# Altium PCB UControl_Module_PCB.PcbDoc
Units mm, origin at the board's own origin, x right, y up, seen from the top; angles counter-clockwise.
Board outline 135 x 63 mm, 2 copper layers (Top Layer, Bottom Layer); 89 components, 121 nets, 602 pads, 57 vias.
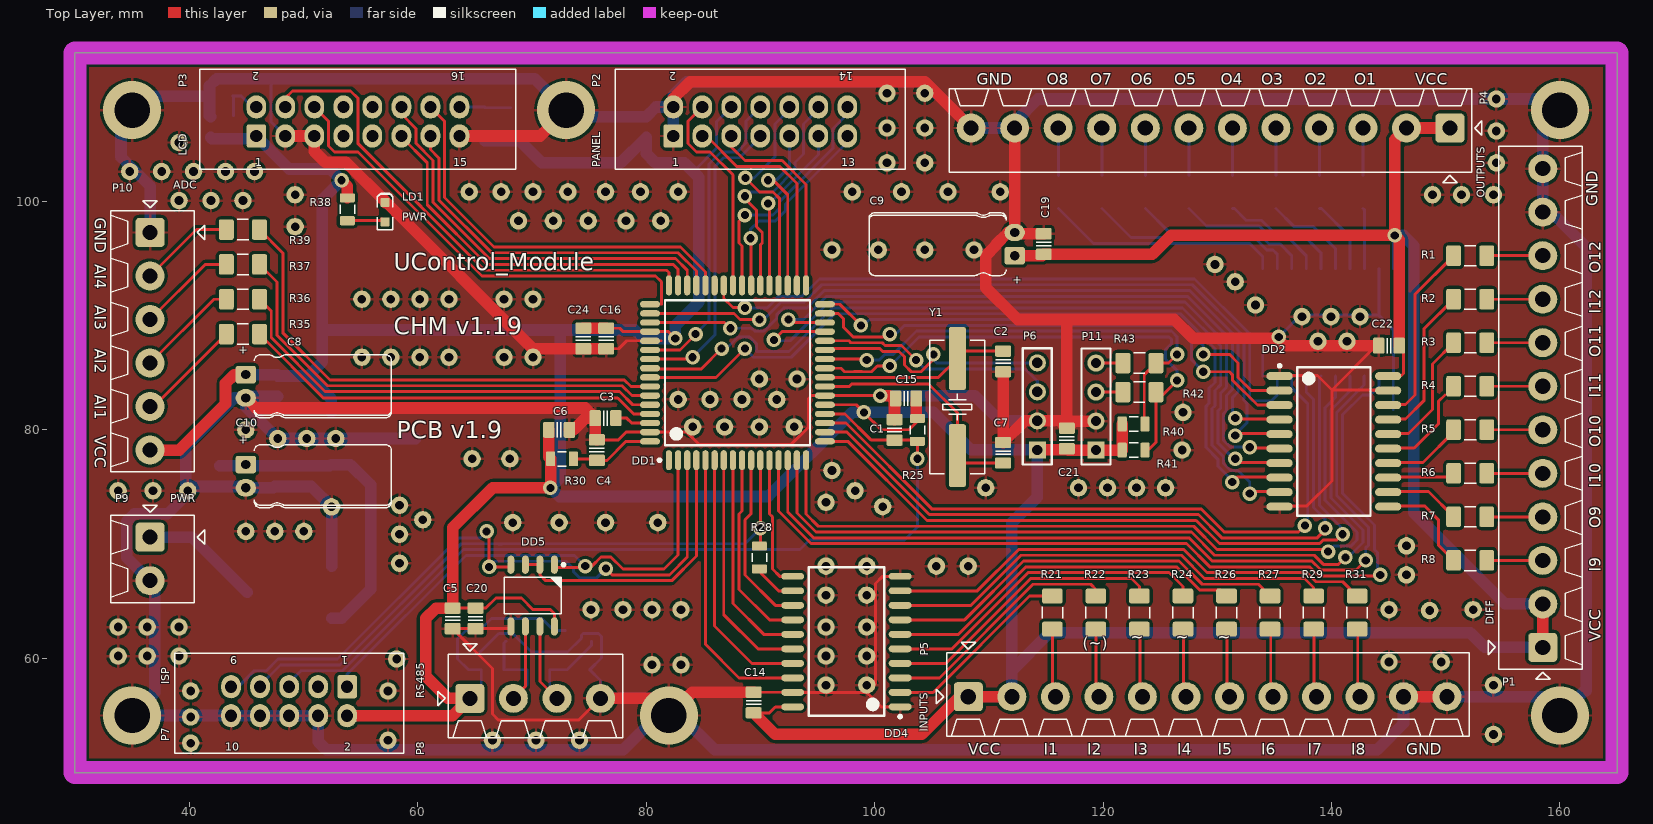
[diagram p0: Top Layer view]
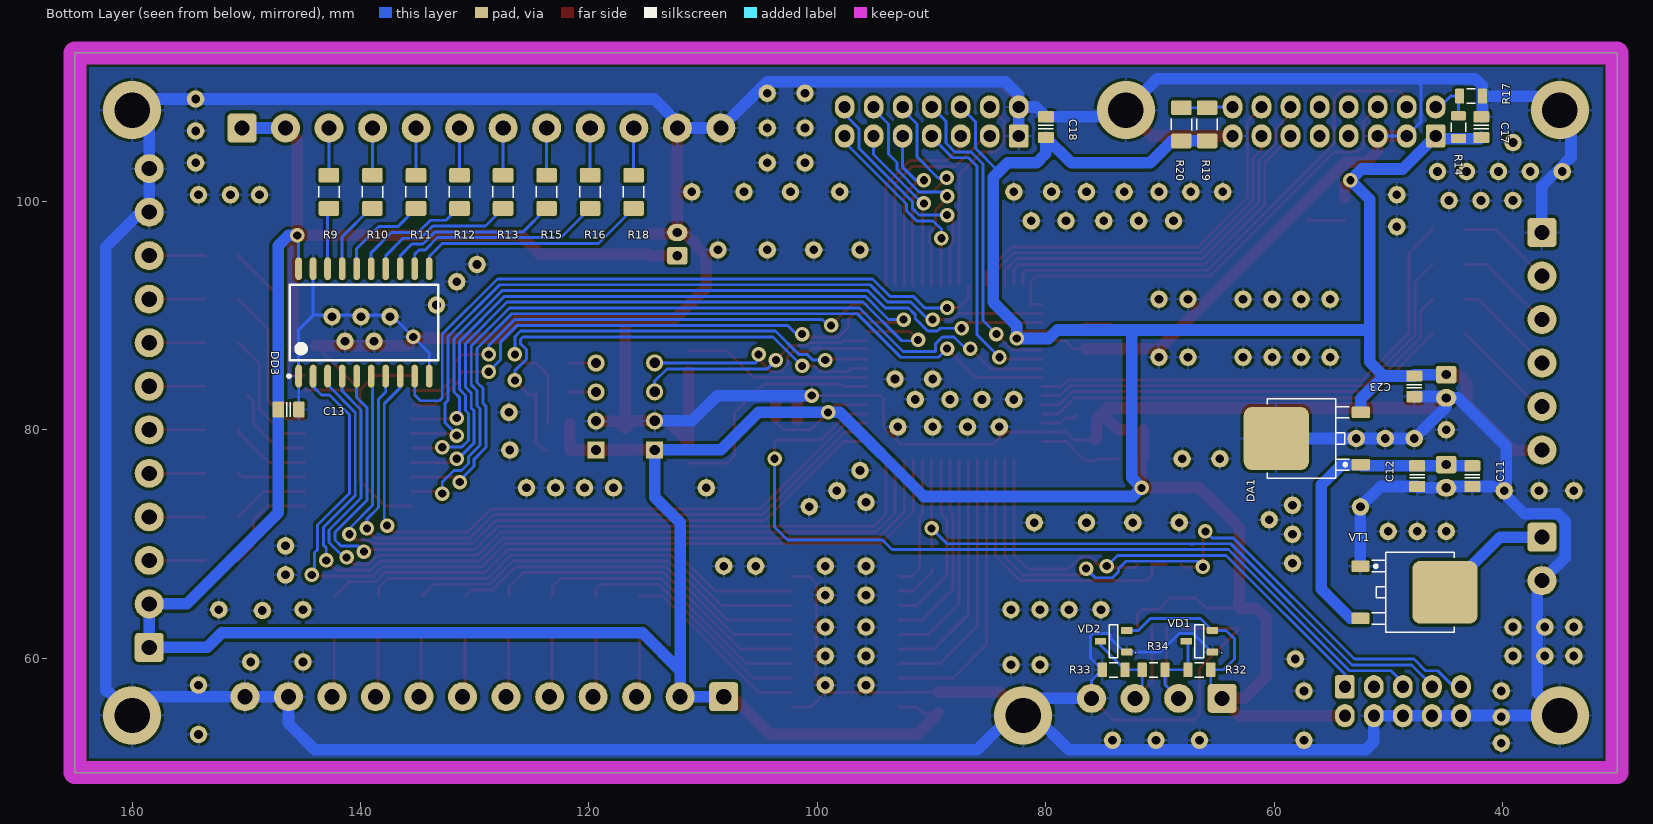
[diagram p1: Bottom Layer view, seen from below]

## Layer stack, top to bottom
Top Solder: solder mask 0.0102, Solder Resist, Dk 3.5
Top Layer: signal copper 0.0356
Dielectric1: dielectric 0.32, FR-4, Dk 4.8
Bottom Layer: signal copper 0.0356
Bottom Solder: solder mask 0.0102, Solder Resist, Dk 3.5

## Board outline
30,50 30,113 165,113 165,50

## Design rules (kind name [scope] priority, off if disabled: settings)
Clearance [All] p1: gap=0.254
PolygonConnect [All] p1: connectstyle=Relief reliefconductorwidth=0.254 reliefentries=4 polygonreliefangle="90 Angle" airgapwidth=0.254
RoutingVias [All] p1: holewidth=0.711 width=1.27 viastyle="Through Hole" minholewidth=0.711 minwidth=1.27 maxholewidth=0.711 maxwidth=1.27
SilkToSolderMaskClearance SilkscreenOverComponentPads [IsPad] p1: minsilkscreentomaskgap=0.254 clearancetoexposedcopper=TRUE
SolderMaskExpansion [All] p1: expansion=0.102
Width "Schematic Width Constraint_2" [InNet('NetP9_1')] p1: maxlimit=1.016 minlimit=0.254 preferedwidth=1.016
Width "Schematic Width Constraint_1" [InNet('GND')] p2: maxlimit=1.016 minlimit=0.254 preferedwidth=1.016
Width "Schematic Width Constraint" [InNet('VCC+12V')] p3: maxlimit=1.016 minlimit=0.254 preferedwidth=1.016
Width "Schematic Width Constraint_3" [InNet('VCC')] p4: maxlimit=1.016 minlimit=0.254 preferedwidth=1.016
Width [All] p5: maxlimit=0.254 minlimit=0.254 preferedwidth=0.254
29 further rules are at their usual default settings.

## Components (designator, comment, footprint, x,y, rotation, side; value= is the part's Value field where it differs from the comment)
C1 "C0805" CAPC2012X135N 101.75,80 r270 top
C2 "C0805" CAPC2012X135N 111.25,86 r90 top
C3 "C0805" CAPC2012X135N 76.454,81.026 r0 top
C4 "C0805" CAPC2012X135N 75.692,78.232 r270 top
C5 "C0805" CAPC2012X135N 63.07,63.5 r90 top
C6 "C0805" CAPC2012X135N 72.39,80.01 r180 top
C7 "C0805" CAPC2012X135N 111.25,78 r270 top
C8 "Cap Pol1" CAPAE200P550X1200_FLAT1 44.958,83.82 r270 top
C9 "Cap Pol1" CAPAE200P550X1200_FLAT1 112.268,96.266 r90 top
C10 "Cap Pol1" CAPAE200P550X1200_FLAT1 44.958,75.946 r270 top
C11 "C0805" CAPC2012X135N 42.672,75.946 r90 bottom
C12 "C0805" CAPC2012X135N 47.498,75.946 r90 bottom
C13 "C0805" CAPC2012X135N 146.304,81.788 r0 bottom
C14 "C0805" CAPC2012X135N 89.408,56.134 r270 top
C15 "C0805" CAPC2012X135N 102.75,82.75 r0 top
C16 "C0805" CAPC2012X135N 76.5,88 r90 top
C17 "C0805" CAPC2012X135N 41.888,106.5 r270 bottom
C18 "C0805" CAPC2012X135N 80,106.5 r270 bottom
C19 "C0805" CAPC2012X135N 114.808,96.266 r270 top
C20 "C0805" CAPC2012X135N 65.07,63.5 r90 top
C21 "C0805" CAPC2012X135N 116.84,79.248 r270 top
C22 "C0805" CAPC2012X135N 145.034,87.376 r0 top
C23 "C0805" CAPC2012X135N 47.752,83.82 r90 bottom
C24 "C0805" CAPC2012X135N 74.5,88 r90 top
DA1 "MC7805CD2TR4G" TO-252 56.134,79.248 r90 bottom
DD1 "ATmega128A-AU" 64A_N 88,85 r90 top
DD2 "MC74VHCT244ADT" 751D-04_M 140.208,78.994 r0 top
DD3 "MC74HC541ADW" 751D-05_N 139.7,89.408 r90 bottom
DD4 "MC74HC541ADW" 751D-05_N 97.536,61.468 r180 top
DD5 "MAX485" SOIC127P600X175-8AN 70.07,65.5 r270 top
LD1 "PWR" LED-0603-BLUE 57.15,99.06 r90 top
P1 "DIFF" 12P_PCB_ScrewTerm_90S_3.81MM 158.496,60.96 r0 top
P2 "PANEL" 14P_PCB_HEADER_BRD_MNT 90,107 r90 top
P3 "LCD" 16P_PCB_HEADER_BRD_MNT 54.768,107 r90 top
P4 "OUTPUTS" 12P_PCB_ScrewTerm_90S_3.81MM 150.368,106.426 r90 top
P5 "INPUTS" 12P_PCB_ScrewTerm_90S_3.81MM 108.204,56.642 r270 top
P6 "DEBUG" HDR1X4 114.25,78.25 r90 top
P7 "ISP" 10P_PCB_HEADER_BRD_MNT 48.75,56.25 r270 top
P8 "RS485" 4P_PCB_ScrewTerm_90S_3.81MM 64.57,56.5 r270 top
P9 "PWR" 2P_PCB_ScrewTerm_90S_3.81MM 36.576,70.612 r180 top
P10 "ADC" 6P_PCB_ScrewTerm_90S_3.81MM 36.576,97.282 r180 top
P11 "INT/I2C" HDR1X4 119.38,78.232 r90 top
R1 "Res2" RESC3216X70N 152.146,95.25 r0 top
R2 "Res2" RESC3216X70N 152.146,91.44 r0 top
R3 "Res2" RESC3216X70N 152.146,87.63 r0 top
R4 "Res2" RESC3216X70N 152.146,83.82 r0 top
R5 "Res2" RESC3216X70N 152.146,80.01 r0 top
R6 "Res2" RESC3216X70N 152.146,76.2 r0 top
R7 "Res2" RESC3216X70N 152.146,72.39 r0 top
R8 "Res2" RESC3216X70N 152.146,68.58 r0 top
R9 "Res2" RESC3216X70N 142.764,100.838 r90 bottom
R10 "Res2" RESC3216X70N 138.954,100.838 r90 bottom
R11 "Res2" RESC3216X70N 135.144,100.838 r90 bottom
R12 "Res2" RESC3216X70N 131.334,100.838 r90 bottom
R13 "Res2" RESC3216X70N 127.524,100.838 r90 bottom
R14 "Res2" RESC2012X70N 43.888,106.5 r90 bottom
R15 "Res2" RESC3216X70N 123.714,100.838 r90 bottom
R16 "Res2" RESC3216X70N 119.904,100.838 r90 bottom
R17 "Res2" RESC2012X70N 42.784,109.22 r0 bottom
R18 "Res2" RESC3216X70N 116.094,100.838 r90 bottom
R19 "Res2" RESC3216X70N 65.888,106.75 r90 bottom
R20 "Res2" RESC3216X70N 68.138,106.75 r90 bottom
R21 "Res2" RESC3216X70N 115.57,64.008 r270 top
R22 "Res2" RESC3216X70N 119.38,64.008 r270 top
R23 "Res2" RESC3216X70N 123.19,64.008 r270 top
R24 "Res2" RESC3216X70N 127,64.008 r270 top
R25 "Res2" RESC2012X70N 103.75,80 r270 top
R26 "Res2" RESC3216X70N 130.81,64.008 r270 top
R27 "Res2" RESC3216X70N 134.62,64.008 r270 top
R28 "Res2" RESC2012X70N 89.916,68.834 r270 top
R29 "Res2" RESC3216X70N 138.43,64.008 r270 top
R30 "Res2" RESC2012X70N 72.644,77.47 r180 top
R31 "Res2" RESC3216X70N 142.24,64.008 r270 top
R32 "Res2" RESC2012X70N 66.57,59 r180 bottom
R33 "Res2" RESC2012X70N 74.07,59 r180 bottom
R34 "Res2" RESC2012X70N 70.57,59 r0 bottom
R35 "Res2" RESC3216X70N 44.704,88.392 r0 top
R36 "Res2" RESC3216X70N 44.704,91.44 r0 top
R37 "Res2" RESC3216X70N 44.704,94.488 r0 top
R38 "Res2" RESC2012X70N 53.848,99.314 r90 top
R39 "Res2" RESC3216X70N 44.704,97.536 r0 top
R40 "Res2" RESC2012X70N 122.682,80.518 r180 top
R41 "Res2" RESC2012X70N 122.682,78.232 r180 top
R42 "Res2" RESC3216X70N 123.19,83.312 r180 top
R43 "Res2" RESC3216X70N 123.19,85.852 r180 top
VD1 "BAV99" SOT23-3 66.57,61.5 r0 bottom
VD2 "BAV99" SOT23-3 74.07,61.5 r0 bottom
VT1 "IRFU5505" TO-252 48.768,65.786 r270 bottom
Y1 "HC49/4H_SMX" CRYSTAL_HC49-US-SM 107.25,82 r90 top

## Footprints (in the part's own frame and the unit in brackets; to place one, negate y for a bottom-side part, rotate by r counter-clockwise, add the part's x,y. Pads: shape width x height; smd on the part's side, far side on the other; paste and mask are expansions set on the pad)
2P_PCB_ScrewTerm_90S_3.81MM [mil] "TERM BLOCK 2POS SIDE ENT STACKABLE 3.81MM"
  rrect25% 100x100 hole 52: 1(0,0)
  round 100 hole 52: 2(0,150)
  silkscreen extent -188,-110 136,226, body extent -152,-75 136,225, height 335
4P_PCB_ScrewTerm_90S_3.81MM [mil]
  rrect25% 100x100 hole 52: 1(0,0)
  round 100 hole 52: 2(0,150) 3(0,300) 4(0,450)
  silkscreen extent -188,-110 136,526, body extent -152,-75 136,525, height 335
6P_PCB_ScrewTerm_90S_3.81MM [mil] "TERM BLOCK 6POS SIDE ENT STACKABLE 3.81MM"
  rrect25% 100x100 hole 52: 1(0,0)
  round 100 hole 52: 2(0,150) 3(0,300) 4(0,450) 5(0,600) 6(0,750)
  silkscreen extent -188,-110 136,825, body extent -152,-75 136,825, height 335
10P_PCB_HEADER_BRD_MNT [mil] "HEADER BRD MNT 10POS 2.54MM"
  round 40 on Mech15: 0(0,0)
  rrect25% 80x68 hole 42: 1(-50,200)
  oval 80x68 hole 42: 2(50,200) 3(-50,100) 4(50,100) 5(-50,0) 6(50,0) 7(-50,-100) 8(50,-100) 9(-50,-200) 10(50,-200)
  silkscreen extent -165,-395 180,395, body extent -162,-394 178,394, height 390
12P_PCB_ScrewTerm_90S_3.81MM [mil]
  rrect25% 100x100 hole 52: 1(0,0)
  round 100 hole 52: 2(0,150) 3(0,300) 4(0,450) 5(0,600) 6(0,750) 7(0,900) 8(0,1050) 9(0,1200) 10(0,1350) 11(0,1500) 12(0,1650)
  silkscreen extent -188,-110 136,1726, body extent -152,-75 139,1725, height 335
14P_PCB_HEADER_BRD_MNT [mil] "HEADER BRD MNT 14POS 2.54MM"
  round 40 on Mech15: 0(0,0)
  rrect25% 80x68 hole 42: 1(-50,300)
  oval 80x68 hole 42: 2(50,300) 3(-50,200) 4(50,200) 5(-50,100) 6(50,100) 7(-50,0) 8(50,0) 9(-50,-100) 10(50,-100) 11(-50,-200) 12(50,-200) 13(-50,-300) 14(50,-300)
  silkscreen extent -165,-500 180,500, body extent -162,-494 178,494, height 390
16P_PCB_HEADER_BRD_MNT [mil] "HEADER BRD MNT 16POS 2.54MM"
  round 40 on Mech15: 0(0,0)
  rrect25% 80x68 hole 42: 1(-50,350)
  oval 80x68 hole 42: 2(50,350) 3(-50,250) 4(50,250) 5(-50,150) 6(50,150) 7(-50,50) 8(50,50) 9(-50,-50) 10(50,-50) 11(-50,-150) 12(50,-150) 13(-50,-250) 14(50,-250) 15(-50,-350) 16(50,-350)
  silkscreen extent -165,-545 180,545, body extent -162,-544 178,544, height 390
64A_N [mm] "Thin QFP, 64-Leads, Body 14x14mm, Pitch 0.8mm, IPC Medium Density"
  oval 1.75x0.55 smd: 1(-7.65,6) 2(-7.65,5.2) 3(-7.65,4.4) 4(-7.65,3.6) 5(-7.65,2.8) 6(-7.65,2) 7(-7.65,1.2) 8(-7.65,0.4) 9(-7.65,-0.4) 10(-7.65,-1.2) 11(-7.65,-2) 12(-7.65,-2.8) 13(-7.65,-3.6) 14(-7.65,-4.4) 15(-7.65,-5.2) 16(-7.65,-6) 33(7.65,-6) 34(7.65,-5.2) 35(7.65,-4.4) 36(7.65,-3.6) 37(7.65,-2.8) 38(7.65,-2) 39(7.65,-1.2) 40(7.65,-0.4) 41(7.65,0.4) 42(7.65,1.2) 43(7.65,2) 44(7.65,2.8) 45(7.65,3.6) 46(7.65,4.4) 47(7.65,5.2) 48(7.65,6)
  oval 0.55x1.75 smd: 17(-6,-7.65) 18(-5.2,-7.65) 19(-4.4,-7.65) 20(-3.6,-7.65) 21(-2.8,-7.65) 22(-2,-7.65) 23(-1.2,-7.65) 24(-0.4,-7.65) 25(0.4,-7.65) 26(1.2,-7.65) 27(2,-7.65) 28(2.8,-7.65) 29(3.6,-7.65) 30(4.4,-7.65) 31(5.2,-7.65) 32(6,-7.65) 49(6,7.65) 50(5.2,7.65) 51(4.4,7.65) 52(3.6,7.65) 53(2.8,7.65) 54(2,7.65) 55(1.2,7.65) 56(0.4,7.65) 57(-0.4,7.65) 58(-1.2,7.65) 59(-2,7.65) 60(-2.8,7.65) 61(-3.6,7.65) 62(-4.4,7.65) 63(-5.2,7.65) 64(-6,7.65)
  silkscreen extent -7.77,-6.35 6.35,6.95, body extent -7,-7 7,7, height 1.2
751D-04_M [mm] "SOIC, 20-Leads, Body 12.8x7.5mm, Pitch 1.27mm, IPC Low Density"
  oval 2.3x0.7 smd: 1(-4.75,5.715) 2(-4.75,4.445) 3(-4.75,3.175) 4(-4.75,1.905) 5(-4.75,0.635) 6(-4.75,-0.635) 7(-4.75,-1.905) 8(-4.75,-3.175) 9(-4.75,-4.445) 10(-4.75,-5.715) 11(4.75,-5.715) 12(4.75,-4.445) 13(4.75,-3.175) 14(4.75,-1.905) 15(4.75,-0.635) 16(4.75,0.635) 17(4.75,1.905) 18(4.75,3.175) 19(4.75,4.445) 20(4.75,5.715)
  silkscreen extent -4.87,-6.5 3.2,6.74, body extent -3.8,-6.5 3.8,6.5, height 2.65
751D-05_N [mm] "SOIC, 20-Leads, Body 12.8x7.5mm, Pitch 1.27mm, IPC Medium Density"
  oval 2x0.6 smd: 1(-4.7,5.715) 2(-4.7,4.445) 3(-4.7,3.175) 4(-4.7,1.905) 5(-4.7,0.635) 6(-4.7,-0.635) 7(-4.7,-1.905) 8(-4.7,-3.175) 9(-4.7,-4.445) 10(-4.7,-5.715) 11(4.7,-5.715) 12(4.7,-4.445) 13(4.7,-3.175) 14(4.7,-1.905) 15(4.7,-0.635) 16(4.7,0.635) 17(4.7,1.905) 18(4.7,3.175) 19(4.7,4.445) 20(4.7,5.715)
  silkscreen extent -4.82,-6.5 3.3,6.69, body extent -3.8,-6.5 3.8,6.5, height 2.65
CAPAE200P550X1200_FLAT1 [mil]
  round 20 on Mech15: 0(0,0)
  rrect25% 60x70 hole 31.5: 1(-40,0)
  oval 60x70 hole 31.5: 2(40,0)
  silkscreen extent -108,30 108,502, body extent -107,-10 107,502, height 216
CAPC2012X135N [mm] "Chip Capacitor, Body 2.0x1.2mm, EIA 0805, IPC Medium Density"
  round 0.254 on Mech15: 0(0,0)
  rrect25% 1x1.4 smd: 1(-0.9,0) 2(0.9,0)
  Top Layer pour cut-out: -0.675,0.7 -0.475,0.9 0.475,0.9 0.675,0.7 0.675,-0.7 0.475,-0.9 -0.475,-0.9 -0.675,-0.7
  silkscreen extent -0.15,-0.65 0.15,0.65, body extent -1.1,-0.72 1.1,0.73, height 1.34
CRYSTAL_HC49-US-SM [mm] "SMD Crystal HC49/US-SM package"
  round 0.508 on Mech15: 0(0,0)
  rrect25% 5.5x1.5 smd: 1(-4.25,0) 2(4.25,0)
  silkscreen extent -5.84,-2.41 5.84,2.41, body extent -6.4,-2.41 6.4,2.42, height 4.29
HDR1X4 [mm] "Connector; Header; 4 Position"
  rect 1.5x1.5 hole 0.9: 1(0,0)
  round 1.5 hole 0.9: 2(2.54,0) 3(5.08,0) 4(7.62,0)
  silkscreen extent -1.27,-1.27 8.89,1.27
LED-0603-BLUE [mm]
  round 0.254 on Mech15: 0(0,0)
  rrect25% 0.8x0.8 smd: A(-0.85,0) K(0.85,0)
  Top Layer pour cut-out: -0.5,0.5 0.5,0.5 0.5,-0.5 -0.5,-0.5
  silkscreen extent -1.55,-0.67 1.68,0.67, body extent -0.8,-0.4 0.8,0.4, height 0.75
RESC2012X70N [mm] "Chip Resistor, Body 2.0x1.2mm, EIA 0805, IPC Medium Density"
  round 0.254 on Mech15: 0(0,0)
  rrect25% 0.8x1.3 smd: 1(-1,0) 2(1,0)
  Top Layer pour cut-out: -0.725,0.65 -0.525,0.85 0.525,0.85 0.725,0.65 0.725,-0.65 0.525,-0.85 -0.525,-0.85 -0.725,-0.65
  silkscreen extent -0.38,-0.64 0.38,0.64, body extent -1.1,-0.67 1.1,0.68, height 0.69
RESC3216X70N [mm] "Chip Resistor, Body 3.2x1.6mm, EIA 1206, IPC Medium Density"
  round 0.508 on Mech15: 0(0,0)
  rrect25% 1.3x1.8 smd: 1(-1.45,0) 2(1.45,0)
  silkscreen extent -0.51,-0.89 0.51,0.89, body extent -1.62,-0.82 1.63,0.83, height 0.69
SOIC127P600X175-8AN [mm] "SOIC, 8-Leads, Body 4.9x3.9mm, Pitch 1.27mm, IPC Medium Density"
  round 1 on Mech15: 0(0,0)
  oval 1.6x0.6 smd: 1(-2.7,1.905) 2(-2.7,0.635) 3(-2.7,-0.635) 4(-2.7,-1.905) 5(2.7,-1.905) 6(2.7,-0.635) 7(2.7,0.635) 8(2.7,1.905)
  silkscreen extent -2.82,-2.5 1.6,2.83, body extent -3,-2.45 3,2.45, height 1.75
SOT23-3 [mm] "SOT23, 3 pin"
  round 0.5 on Mech15: 0(0,0)
  rrect25% 1x0.6 smd: 1(-1.15,0.95) 2(-1.15,-0.95) 3(1.15,0)
  silkscreen extent -0.38,-1.45 0.38,1.45, body extent -1.4,-1.45 1.4,1.45, height 1.29
TO-252 [mm] "D-PAK/TO-252-AA; 3 Leads (1 Cropped); Body 10.3 (inc. leads) x 6.7 mm (LxW max)"
  round 0.5 on Mech15: 0(0,0)
  rrect25% 1x1.6 smd: 1(-2.285,-3.7) 3(2.285,-3.7)
  rrect25% 5.5x5.7 smd: 4(0,3.7)
  silkscreen extent -3.5,-2.7 3.5,4.5, body extent -3.3,-3.95 3.3,5.76, height 2.31

## Part data
C1 C2 C3 C4 C5 C6 C7 C11 C12 C13 C14 C15 C16 C17 C18 C19 C20 C21 C22 C23 C24: "Ceramic Chip Capacitor - Standard"
C8 C9 C10: "Polarized Capacitor (Radial)"
DA1: library part µA78M05CKTPR, "Positive-Voltage Regulator"
DD1: "8-bit AVR Microcontroller, 128KB Flash, 4KB EEPROM, 4KB SRAM, 64-pin TQFP, Industrial Grade (-40°C to 85°C)"
DD2: "vit"
DD3 DD4: "Octal 3-State Non-Inverting Buffer/Line Driver/Line Receiver"
DD5: library part ST485
LD1: library part LED, "APT1608QBC/D"
P1 P4 P5: library part "Header 12", "Header, 12-Pin"
P2: library part "Header 14", "Header, 14-Pin"
P3: library part "Header 16", "Header, 16-Pin"
P6 P11: library part "Header 4", "Header, 4-Pin"
P7: library part "Header 5X2", "Header, 5-Pin, Dual row"
P8: library part MHDR1X4, "Header, 4-Pin"
P9: library part "Header 2H", "Header, 2-Pin, Right Angle"
P10: library part "Header 6", "Header, 6-Pin"
R1 R2 R3 R4 R5 R6 R7 R8 R9 R10 R11 R12 R13 R14 R15 R16 R17 R18 R19 R20 R21 R22 R23 R24 R25 R26 R27 R28 R29 R30 R31 R32 R33 R34 R35 R36 R37 R38 R39 R40 R41 R42 R43: "Resistor"
VD1 VD2: "Silicon Switching Diode Array for High-Speed Switching"
VT1: "HEXFET Power MOSFET"
Y1: "Surface Mount Quartz Crystal"

## Free pads (board coordinates)
  round 1.524 hole 0.762: 1(82.804,100.838) 2(73.152,100.838) 3(76.454,100.838) 4(79.502,100.838) 5(98.044,100.838) 6(102.362,100.838) 7(106.426,100.838) 8(110.998,100.838) 9(96.266,95.758) 10(100.33,95.758) 11(104.394,95.758) 12(108.712,95.758) 13(137.414,89.916) 14(139.954,89.916) 15(142.494,89.916) 16(148.844,100.584) 17(151.384,100.584) 18(154.178,100.584) 19(109.728,74.93) 20(117.856,74.93) 21(120.396,74.93) 22(122.936,74.93) 23(125.476,74.93) 25(127,81.534) 26(126.925,78.233) 28(145.034,64.262) 29(148.591,64.187) 31(152.4,64.262) 32(146.558,69.85) 33(146.558,67.31) 34(145.034,59.69) 36(149.606,59.69) 37(154.178,53.34) 38(75.184,64.262) 39(77.978,64.262) 40(80.518,64.262) 41(83.058,64.262) 43(83.058,59.436) 44(80.518,59.436) 47(81.026,71.882) 49(76.454,71.882) 51(72.39,71.882) 53(68.326,71.882) 55(68.072,77.47) 56(64.77,77.47) 58(57.404,57.15) 59(58.166,59.944) 61(58.42,68.326) 62(58.42,70.866) 63(58.42,73.406) 64(60.452,72.136) 66(70.104,86.36) 67(67.564,86.36) 69(62.738,86.36) 70(60.198,86.36) 71(57.658,86.36) 72(55.118,86.36) 73(70.104,91.44) 74(67.564,91.44) 76(62.738,91.44) 77(60.198,91.44) 78(57.658,91.44) 79(55.118,91.44) 80(49.276,100.584) 81(49.276,97.79) 83(45.72,102.616) 84(43.18,102.616) 85(40.386,102.616) 86(37.592,102.616) 87(34.798,102.616) 88(39.116,105.156) 89(39.116,100.076) 90(41.91,100.076) 91(44.704,100.076) 92(70.104,100.838) 93(67.31,100.838) 94(68.834,98.298) 95(71.882,98.298) 96(74.93,98.298) 97(78.232,98.298) 98(81.28,98.298) 100(50.038,71.12) 101(47.498,71.12) 102(44.958,71.12) 104(33.782,62.738) 105(36.322,62.738) 106(39.116,62.738) 107(33.782,60.198) 108(36.322,60.198) 109(39.116,60.198) 110(40.132,52.578) 111(40.132,54.864) 112(40.132,57.15) 113(57.404,52.832) 114(66.548,52.832) 115(70.358,52.832) 116(74.168,52.832) 117(129.794,94.488) 118(52.832,79.248) 119(50.292,79.248) 120(47.752,79.248) 121(44.958,80.01) 123(36.83,74.676) 124(33.782,74.676) 125(39.878,74.676) 126(52.468,73.262) 127(82.804,82.669) 128(85.598,82.669) 129(88.392,82.669) 130(91.44,82.669) 132(84.074,80.264) 133(86.868,80.264) 134(89.916,80.264) 135(92.964,80.264) 136(89.916,84.447) 137(93.218,84.447) 139(104.394,103.378) 140(104.394,106.426) 141(104.394,109.474) 142(101.092,109.474) 143(101.092,106.426) 144(101.092,103.378) 145(64.516,100.838) 147(154.178,57.658) 148(138.811,87.757) 149(141.351,87.757) 150(131.572,92.964) 151(133.35,90.932) 152(154.432,108.966) 153(154.432,106.172) 154(154.432,103.378) 155(108.204,68.072) 156(105.41,68.072) 157(95.758,68.072) 158(99.314,68.072) 161(95.758,65.532) 162(95.758,62.738) 163(95.758,60.198) 164(95.758,57.658) 165(99.314,65.532) 166(99.314,62.738) 167(99.314,60.198) 168(99.314,57.658) 174(95.758,73.66) 175(96.266,76.454) 176(98.298,74.676) 177(100.711,73.279)

## Via types
v1: diameter 1.27, hole 0.711, Top Layer to Bottom Layer, 51 vias
v2: diameter 5.08, hole 3.1, Top Layer to Bottom Layer, 6 vias

## Nets (pads, with @x,y where several pads share a name; then routed paths per layer and width w, separated by ;. In a path a pad name is that pad's centre, name@x,y a point inside that pad or via, vN(x,y) a via of type N, cw(c..) or ccw(c..) an arc to the next point about the centre after c; other vN are vias at no path point)
A: DD5.6 P8.2 R32.1 R34.1 VD1.3 | length 14.3
  Top Layer w0.254: P8.2 69.435,57.555 DD5.6
  Bottom Layer w0.254: VD1.3 67.57,61.35 R32.1 R34.1 69.57,57.69 P8.2
ADC0: DD1.61 R35.2 | length 37.1
  Top Layer w0.254: R35.2 51.742,82.804 77.514,82.804 78.918,81.4 DD1.61
ADC1: DD1.60 R36.2 | length 39.4
  Top Layer w0.254: R36.2 47.185,90.409 47.185,88.079 51.903,83.361 77.675,83.361 78.836,82.2 DD1.60
ADC2: DD1.59 R37.2 | length 41.7
  Top Layer w0.254: R37.2 47.693,92.949 47.693,88.29 52.114,83.869 77.885,83.869 78.754,83 DD1.59
ADC3: DD1.58 R39.2 | length 44
  Top Layer w0.254: R39.2 48.201,95.489 48.201,88.5 52.324,84.377 78.096,84.377 78.673,83.8 DD1.58
AREF: C3.2 DD1.62 | length 3.5
  Top Layer w0.254: C3.2 C3.2@77.608,81.026 ; C3.2@77.354,81.28 C3.2@77.608,81.026 ; DD1.62 78.74,80.6 78.314,81.026 C3.2@77.608,81.026
AVCC: C4.2 DD1.64 R30.1 | length 7.5
  Top Layer w0.254: R30.1 75.554,77.47 C4.2 76.57,77.332 78.238,79 DD1.64
B: DD5.7 P8.3 R33.2 R34.2 VD2.3 | length 14.6
  Top Layer w0.254: DD5.7 70.705,57.985 P8.3
  Bottom Layer w0.254: P8.3 71.57,57.12 R34.2 R33.2 75.22,61.15 VD2.3
B_LIG: P3.16 R19.2 R20.2 | length 4.5
  Bottom Layer w0.254: P3.16 R19.2@65.888,108.27 ; R19.2 R20.2
BPR: DD1.55 P2.7 | length 26.4
  Top Layer w0.254: DD1.55 83.914,86.2 v1(84.074,86.36)
  Bottom Layer w0.254: v1(84.074,86.36) 86.019,88.305 86.019,103.065 86.778,103.825 88.186,103.825 90,105.639 P2.7
BUT1: DD1.54 P2.8 | length 28.2
  Top Layer w0.254: DD1.54 80.35,86.987 82.971,86.987 84.328,88.344 v1(84.328,88.392) v1@83.82,88.392
  Bottom Layer w0.254: v1(84.328,88.392) 85.511,89.575 85.511,103.276 86.568,104.333 87.976,104.333 88.755,105.113 88.755,107.025 P2.8
BUT2: DD1.35 P2.9 | length 15.3
  Top Layer w0.254: v1(90.678,101.854) 91.13,101.854 92.4,100.584 DD1.35
  Bottom Layer w0.254: v1(90.678,101.854) 91.396,101.854 92.54,102.998 P2.9
BUT3: DD1.36 P2.10 | length 19.6
  Top Layer w0.254: v1(88.7,102.054) 89.916,100.838 91.099,100.838 91.694,100.243 91.694,92.744 DD1.36
  Bottom Layer w0.254: v1(88.7,102.054) 89.441,102.054 91.295,103.908 91.295,106.789 92.54,108.034 P2.10
BUT4: DD1.37 P2.11 | length 15
  Top Layer w0.254: v1@90.668,99.822 90.8,99.69 DD1.37
  Bottom Layer w0.254: v1(90.678,99.822) 90.801,99.822 95.08,104.101 P2.11
BUT5: DD1.38 P2.12 | length 20.2
  Top Layer w0.254: v1(88.646,100.457) 88.646,100.243 89.662,99.227 89.662,97.79 90.17,97.282 90.17,96.353 90,96.183 DD1.38
  Bottom Layer w0.254: v1(88.646,100.457) 89.027,100.838 91.099,100.838 93.048,102.787 93.048,103.403 93.785,104.14 93.785,106.785 95.08,108.08 P2.12
BUT6: DD1.39 P2.13 | length 17.9
  Top Layer w0.254: v1@88.9,96.774 89.2,96.474 DD1.39
  Bottom Layer w0.254: v1@88.9,96.774 v1@89.154,97.028 ; v1(89.154,96.774) v1@89.154,97.028 ; P2.13 97.62,105.204 92.202,99.786 92.202,99.191 91.309,98.298 89.872,98.298 89.154,97.58 v1@89.154,97.028
BUT7: DD1.40 P2.14 | length 21.1
  Top Layer w0.254: DD1.40 88.4,96.091 88.138,96.353 88.138,98.298 v1(88.646,98.806)
  Bottom Layer w0.254: v1(88.646,98.806) 91.099,98.806 91.694,99.401 91.694,99.996 96.375,104.678 96.375,106.398 97.62,107.643 P2.14
CONTR: P3.2 R14.2 R17.2 | length 4.1
  Bottom Layer w0.254: R17.2 44.562,109.22 45.512,108.27 P3.2 ; R14.2 R17.2@43.888,109.116
D4: DD1.47 P3.11 | length 32.7
  Top Layer w0.254: P3.11 58.578,105.639 60.839,103.378 60.839,99.716 66.067,94.488 82.374,94.488 82.8,94.062 DD1.47
D5: DD1.46 P3.12 | length 35.5
  Top Layer w0.254: P3.12 58.578,107.643 59.873,106.347 59.873,105.062 61.347,103.589 61.347,99.927 66.277,94.996 82.584,94.996 83.6,93.98 DD1.46
D6: DD1.45 P3.13 | length 32.3
  Top Layer w0.254: P3.13 61.118,104.536 61.855,103.799 61.855,100.137 66.488,95.504 82.794,95.504 84.4,93.898 DD1.45
D7: DD1.44 P3.14 | length 35.1
  Top Layer w0.254: P3.14 62.363,107.025 62.363,100.348 66.698,96.012 83.005,96.012 85.2,93.817 DD1.44
DIR_ROT: DD1.29 DD2.7 | length 62.5
  Top Layer w0.254: v1(91.186,87.884) 91.902,88.6 DD1.29 ; v1(131.572,77.47) 131.905,77.137 DD2.7@135.524,77.137
  Bottom Layer w0.254: v1(91.186,87.884) 91.269,87.801 92.627,87.801 96.012,91.186 127.174,91.186 130.81,87.55 130.81,83.74 130.302,83.232 130.302,81.911 130.048,81.657 130.048,78.871 131.449,77.47 v1(131.572,77.47)
DIR_VERT: DD1.30 DD2.6 | length 58.9
  Top Layer w0.254: v1(92.456,89.662) 92.718,89.4 DD1.30 ; v1(132.842,78.486) 132.921,78.407 DD2.6@135.524,78.407
  Bottom Layer w0.254: v1(92.456,89.662) 93.77,89.662 95.802,91.694 127.385,91.694 131.318,87.761 131.318,83.53 130.81,83.022 130.81,81.701 130.556,81.447 130.556,79.081 131.151,78.486 v1(132.842,78.486)
E: DD1.49 P3.6 | length 41
  Top Layer w0.254: P3.6 52.203,107.025 52.203,104.847 52.717,104.333 54.785,104.333 65.646,93.472 80.836,93.472 81.344,92.964 81.344,91.778 81.348,91.774 81.348,91 DD1.49
GND: C1.1 C2.1 C3.1 C4.1 C5.1 C6.1 C7.1 C8.2 C9.2 C10.2 C11.1 C12.1 C13.1 C14.1 C15.1 C16.1 C17.1 C18.1 C19.1 C20.1 C21.1 C22.1 C23.1 C24.1 DA1.4 DD1.22 DD1.53 DD1.63 DD2.1 DD2.10 DD2.19 DD3.1 DD3.10 DD3.19 DD4.1 DD4.10 DD4.19 DD5.5 LD1.K P1.11 P1.12 P2.1 P2.2 P3.3 P3.5 P3.15 P4.11 P4.12 P5.11 P5.12 P6.2 P7.4 P7.6 P7.8 P7.10 P8.4 P9.2 P10.1 P11.2 pad.1 pad.2 pad.3 pad.4 pad.5 pad.6 pad.7 pad.8 pad.9 pad.10 pad.11 pad.12 pad.13 pad.14 pad.15 pad.16 pad.17 pad.18 pad.19 pad.20 pad.21 pad.22 pad.23 pad.25 pad.26 pad.28 pad.29 pad.31 pad.32 pad.33 pad.34 pad.36 pad.37 pad.38 pad.39 pad.40 pad.41 pad.43 pad.44 pad.47 pad.49 pad.51 pad.53 pad.55 pad.56 pad.58 pad.59 pad.61 pad.62 pad.63 pad.64 pad.66 pad.67 pad.69 pad.70 pad.71 pad.72 pad.73 pad.74 pad.76 pad.77 pad.78 pad.79 pad.80 pad.81 pad.83 pad.84 pad.85 pad.86 pad.87 pad.88 pad.89 pad.90 pad.91 pad.92 pad.93 pad.94 pad.95 pad.96 pad.97 pad.98 pad.100 pad.101 pad.102 pad.104 pad.105 pad.106 pad.107 pad.108 pad.109 pad.110 pad.111 pad.112 pad.113 pad.114 pad.115 pad.116 pad.117 pad.118 pad.119 pad.120 pad.121 pad.123 pad.124 pad.125 pad.126 pad.127 pad.128 pad.129 pad.130 pad.132 pad.133 pad.134 pad.135 pad.136 pad.137 pad.139 pad.140 pad.141 pad.142 pad.143 pad.144 pad.145 pad.147 pad.148 pad.149 pad.150 pad.151 pad.152 pad.153 pad.154 pad.155 pad.156 pad.157 pad.158 pad.161 pad.162 pad.163 pad.164 pad.165 pad.166 pad.167 pad.168 pad.174 pad.175 pad.176 pad.177 R17.1 R33.1 VD1.1 VD2.1 VT1.1 | length 820.3
  Top Layer w0.254: DD5.5@68.04,62.925 DD5.5@68.165,63.05 ; DD5.5 67.965,62.6 C20.1 C5.1 66.548,59.122 66.548,55.118 67.056,54.61 74.11,54.61 P8.4 ; C4.1 77.585,79.132 78.253,79.8 DD1.63 83.566,79.8 84.626,78.74 92.71,78.74 94.234,80.264 94.234,82.746 94.488,83 DD1.22 v1(100.5,83) ; C16.1 77.6,87.1 78.3,87.8 DD1.53 81.316,87.8 ; C14.1 92.825,57.034 DD4.19 pad.168@99.314,57.023 ; DD4.1 100.584,55.753 pad.168@99.314,57.023 ; DD4.10 100.711,67.183 100.076,66.548 100.076,57.785 pad.168@99.314,57.023 ; C7.1 C7.1@111.854,78.9 ; DD2.10@135.524,73.327 137.843,73.327 140.033,75.517 140.033,83.487 ; DD2.1@135.524,84.757 138.763,84.757 140.033,83.487 ; C22.1 143.922,87.376 140.033,83.487 ; DD2.19@144.924,83.487 140.033,83.487 ; P5.11@146.1,57 P5.11@146.304,57
  Top Layer w1.016: C8.2 45.847,81.915 74.665,81.915 C3.1 ; P3.3 P3.5 50.958,104.394 51.908,103.444 53.726,103.444 57.15,100.02 LD1.K 57.269,99.91 70.079,87.1 C24.1 C16.1 ; P3.15 70.73,105.73 v2(73,108) ; C6.1 73.66,80.01 74.676,81.026 C3.1 ; C4.1 75.554,79.27 C3.1 ; P8.4 80.5,56.5 v2(82,55) 84.034,57.034 C14.1 ; P2.2 82.38,109.016 83.854,110.49 104.41,110.49 P4.12@108.474,106.426 ; v1(100.5,83) 101.337,83 101.66,82.677 101.75,82.677 C1.1 ; C2.1 C7.1 113.14,80.79 P6.2 116.198,80.79 C21.1 ; P4.11 C9.2 ; C19.1 112.384,97.166 C9.2 ; P11.2 117.464,80.772 C21.1 ; C22.1@143.922,87.376 135.89,87.376 135.255,88.011 127.889,88.011 126.238,89.662 116.84,89.662 ; P5.11 P5.12 ; C9.2 111.683,97.282 110.617,96.216 110.617,96.139 109.728,95.25 109.728,92.456 112.522,89.662 116.84,89.662 ; C21.1 116.84,89.662
  Bottom Layer w0.254: 47.509,110.5 47.173,110.165 47.173,106.975 P3.3 P3.5 ; VD1.1 65.475,60.55 67.106,62.181 68.334,62.181 69.965,60.55 VD2.1 73.12,60.55 74.339,61.769 74.339,62.035 74.485,62.181 75.834,62.181 76.101,61.914 76.101,60.031 R33.1 76,58.07 P8.4 ; P2.1@82.5,105.5 P2.2@82.5,108.04 ; DD3.10 133.985,86.741 v1(135.382,88.138) 137.287,90.043 144.145,90.043 ; DD3.19 144.145,90.043 ; C13.1 145.404,84.697 DD3.1 145.415,88.773 144.145,90.043
  Bottom Layer w1.016: P10.1 36.576,101.346 34.036,103.886 34.036,107.036 36.22,109.22 R17.1 ; C17.1 41.784,107.504 R17.1 ; C12.1@47.382,74.93 C10.2 44.842,75.046 C11.1 pad.125@40.502,75.046 ; C12.1 50.684,75.046 pad.126 VT1.1 ; C23.1 45.074,82.92 C8.2 ; DA1.4 pad.120 44.958,82.042 C8.2 ; P8.4 80.5,56.5 v2(82,55) ; P2.1 P2.2 ; v1@100.431,82.931 v1(100.5,83) 108.77,83 110.98,80.79 P6.2 ; pad.125@40.502,75.046 39.704,75.046 39.704,78.566 43.942,82.804 C8.2 ; pad.125@40.502,75.046 38.1,72.644 35.176,72.644 34.544,72.012 34.544,68.834 P9.2 37,66.378 37,57 35,55 43.65,55 P7.10 P7.8 P7.6 P7.4 51.29,52.71 52,52 78,52 81,55 v2(82,55) ; R17.1 41.784,110.11 42.418,110.744 70.256,110.744 v2(73,108) 73.6,107.4 C18.1 80.87,108.27 P2.2 ; v2(82,55) 83,55 86,52 144,52 146.304,54.304 P5.11 P5.12 158.358,56.642 v2(160,55) 162.15,57.15 162.306,57.15 162.306,96.012 159.258,99.06 P1.11 P1.12 158.496,106.496 v2(160,108) 159.034,108.966 114.3,108.966 112.268,106.934 P4.11 P4.12 104.394,110.49 83.566,110.49 82.38,109.304 P2.2
  other v2: 35.01,55 35,108
IN_1: DD1.5 DD4.18 | length 25
  Top Layer w0.254: DD1.5 85.2,61.231 88.138,58.293 DD4.18
IN_2: DD1.6 DD4.17 | length 22.7
  Top Layer w0.254: DD1.6 86,62.844 89.281,59.563 DD4.17
IN_3: DD1.7 DD4.16 | length 20.8
  Top Layer w0.254: DD1.7 86.8,63.822 89.789,60.833 DD4.16
IN_4: DD1.8 DD4.15 | length 18.9
  Top Layer w0.254: DD1.8 87.6,64.8 90.297,62.103 DD4.15
IN_5: DD1.9 DD4.14 | length 17.2
  Top Layer w0.254: DD1.9 88.4,72.898 88.138,72.636 88.138,66.04 90.805,63.373 DD4.14
IN_6: DD1.10 DD4.13 | length 15.6
  Top Layer w0.254: DD1.10 89.2,72.682 88.646,72.128 88.646,67.31 91.313,64.643 DD4.13
IN_7: DD1.11 P7.7 R28.1 | length 57.4
  Top Layer w0.254: R28.1@89.916,69.58 R28.1 90,69.918 v1(90,71.374) DD1.11
  Bottom Layer w0.254: P7.7 46.21,57.64 47.995,59.425 53.207,59.425 63.814,70.032 67.092,70.032 67.1,70.024 67.397,70.024 67.405,70.032 88.658,70.032 v1(90,71.374)
IN_8: DD1.12 DD4.11 | length 11.7
  Top Layer w0.254: DD1.12 90.8,72.644 91.054,72.39 91.054,67.823 91.694,67.183 DD4.11
INT0/SCL: DD1.25 R41.1 R42.1 | length 44.3
  Top Layer w0.254: DD1.25 97.059,85.4 97.369,85.09 98.211,85.09 98.218,85.097 98.886,85.097 98.893,85.09 99.735,85.09 100.243,85.598 v1(101.346,85.598) ; R41.1 123.952,78.232 124.64,78.92 R42.1@124.64,83.058 ; R42.1 R42.1@124.64,83.058 ; v1(126.492,84.328) 125.222,83.058 R42.1@124.64,83.058
  Bottom Layer w0.254: v1(101.346,85.598) 103.886,88.138 125.774,88.138 125.984,87.928 125.984,87.543 125.476,87.035 125.476,86.193 126.492,85.177 v1(126.492,84.328) v1@126.492,84.074
INT1/SDA: DD1.26 R40.1 R43.1 | length 41.6
  Top Layer w0.254: DD1.26 99.22,86.2 v1(99.314,86.106) ; R40.1 123.609,80.591 123.609,84.821 R43.1 125.73,85.852 v1(126.492,86.614)
  Bottom Layer w0.254: v1(99.314,86.106) 100.417,86.106 100.925,86.614 101.644,86.614 103.676,88.646 125.984,88.646 126.492,88.138 v1(126.492,86.614)
LD1: DD1.34 P2.3 | length 19.1
  Top Layer w0.254: P2.3 85.278,105.73 87.938,103.07 89.121,103.07 ; 89.237,102.953 89.121,103.07 ; DD1.34 93.2,101.574 91.704,103.07 89.121,103.07
LD2: DD1.41 P2.4 | length 18.5
  Top Layer w0.254: P2.4 83.675,107.025 83.675,105.062 84.404,104.333 85.599,104.333 87.6,102.332 DD1.41
LD3: DD1.33 P2.5 | length 17.7
  Top Layer w0.254: P2.5 87.46,104.764 88.646,103.578 91.915,103.578 94,101.493 DD1.33
MOW_EN: DD1.50 DD2.5 | length 68.6
  Top Layer w0.254: DD1.50 87.687,90.2 88.225,89.662 v1(89.916,89.662) ; v1(131.572,79.502) 131.747,79.677 DD2.5@135.524,79.677
  Bottom Layer w0.254: v1(89.916,89.662) 90.301,89.662 91.825,91.186 93.857,91.186 95.381,92.71 127.806,92.71 132.334,88.182 132.334,82.594 132.588,82.34 132.588,80.605 131.572,79.589 v1(131.572,79.502)
MOW_ON: DD1.51 DD2.4 | length 66.5
  Top Layer w0.254: DD1.51 80.35,89.408 86.868,89.408 v1(87.376,88.9) ; v1(131.572,81.026) 131.651,80.947 DD2.4@135.524,80.947
  Bottom Layer w0.254: v1(87.376,88.9) 89.241,88.9 89.495,88.646 90.337,88.646 91.44,89.749 91.44,90.083 92.035,90.678 94.067,90.678 95.591,92.202 127.595,92.202 131.826,87.971 131.826,83.319 131.318,82.811 131.318,81.28 v1(131.572,81.026)
NetDD2_11: DD2.11 R8.1 | length 9
  Top Layer w0.254: DD2.11@144.924,73.327 148.161,73.327 149.352,72.136 149.352,69.924 R8.1
NetDD2_12: DD2.12 R7.1 | length 6.7
  Top Layer w0.254: DD2.12@144.924,74.597 148.489,74.597 R7.1
NetDD2_13: DD2.13 R6.1 | length 5.9
  Top Layer w0.254: DD2.13@144.924,75.867 150.363,75.867 R6.1
NetDD2_14: DD2.14 R5.1 | length 7.1
  Top Layer w0.254: DD2.14@144.924,77.137 148.003,77.137 150.696,79.83 R5.1
NetDD2_15: DD2.15 R4.1 | length 8.1
  Top Layer w0.254: DD2.15@144.924,78.407 147.241,78.407 149.352,80.518 149.352,82.476 149.934,83.058
NetDD2_16: DD2.16 R3.1 | length 11.4
  Top Layer w0.254: DD2.16@144.924,79.677 146.733,79.677 148.844,81.788 148.844,85.778 R3.1
NetDD2_17: DD2.17 R2.1 | length 13.8
  Top Layer w0.254: DD2.17@144.924,80.947 146.479,80.947 148.082,82.55 148.082,88.826 R2.1
NetDD2_18: DD2.18 R1.1 | length 16.3
  Top Layer w0.254: DD2.18@144.924,82.217 146.479,82.217 147.32,83.058 147.32,91.874 R1.1
NetDD3_11: DD3.11 R18.1 | length 20.7
  Bottom Layer w0.254: R18.1 119.157,96.325 132.842,96.325 133.985,95.182 DD3.11
NetDD3_12: DD3.12 R16.1 | length 18.3
  Bottom Layer w0.254: R16.1 122.459,96.833 133.251,96.833 134.326,95.758 134.874,95.758 135.255,95.377 DD3.12
NetDD3_13: DD3.13 R15.1 | length 15.7
  Bottom Layer w0.254: R15.1 125.761,97.341 133.462,97.341 134.537,96.266 135.509,96.266 136.525,95.25 DD3.13
NetDD3_14: DD3.14 R13.1 | length 13.1
  Bottom Layer w0.254: R13.1 129.063,97.849 133.672,97.849 134.747,96.774 136.271,96.774 137.795,95.25 DD3.14
NetDD3_15: DD3.15 R12.1 | length 10.7
  Bottom Layer w0.254: R12.1 131.498,99.388 132.529,98.357 133.882,98.357 134.957,97.282 137.287,97.282 139.065,95.504 DD3.15
NetDD3_16: DD3.16 R11.1 | length 8.4
  Bottom Layer w0.254: R11.1 136.742,97.79 138.43,97.79 140.335,95.885 DD3.16
NetDD3_17: DD3.17 R10.1 | length 6.5
  Bottom Layer w0.254: R10.1 139.118,99.388 141.605,96.901 DD3.17
NetDD3_18: DD3.18 R9.1 | length 5.3
  Bottom Layer w0.254: R9.1 142.875,99.277 DD3.18
NetDD4_2: DD4.2 R21.1 | length 16.8
  Top Layer w0.254: DD4.2 105.13,57.023 113.565,65.458 R21.1
NetDD4_3: DD4.3 R22.1 | length 21.3
  Top Layer w0.254: DD4.3 105.682,58.293 113.878,66.489 118.931,66.489 119.38,66.04 R22.1
NetDD4_4: DD4.4 R23.1 | length 25.2
  Top Layer w0.254: DD4.4 106.233,59.563 113.667,66.997 122.487,66.997 123.19,66.294 R23.1
NetDD4_5: DD4.5 R24.1 | length 28.9
  Top Layer w0.254: DD4.5 106.785,60.833 113.457,67.505 125.789,67.505 127,66.294 R24.1
NetDD4_6: DD4.6 R26.1 | length 32.1
  Top Layer w0.254: DD4.6 107.337,62.103 113.247,68.013 126.439,68.013 128.471,65.981 130.287,65.981 R26.1
NetDD4_7: DD4.7 R27.1 | length 35.8
  Top Layer w0.254: DD4.7 107.888,63.373 113.036,68.521 126.649,68.521 128.681,66.489 133.604,66.489 134.62,65.473 R27.1
NetDD4_8: DD4.8 R29.1 | length 39.9
  Top Layer w0.254: DD4.8 108.44,64.643 112.826,69.029 126.859,69.029 128.891,66.997 137.647,66.997 138.43,66.214 R29.1
NetDD4_9: DD4.9 R31.1 | length 43.2
  Top Layer w0.254: DD4.9 108.991,65.913 112.615,69.537 127.07,69.537 129.102,67.505 137.858,67.505 138.655,66.708 140.99,66.708 R31.1
NetDD4_12: DD4.12 R28.2 | length 3.9
  Top Layer w0.254: R28.2 89.916,67.58 91.583,65.913 DD4.12
NetLD1_A: LD1.A R38.1 | length 3.6
  Top Layer w0.254: R38.1 57.046,98.314 LD1.A ; LD1.A@56.834,98.481 LD1.A@56.984,98.331
NetP1_3: P1.3 R8.2 | length 4.9
  Top Layer w0.254: R8.2 P1.3
NetP1_4: P1.4 R7.2 | length 4.9
  Top Layer w0.254: R7.2 P1.4
NetP1_5: P1.5 R6.2 | length 4.9
  Top Layer w0.254: R6.2 P1.5
NetP1_6: P1.6 R5.2 | length 4.9
  Top Layer w0.254: R5.2 P1.6
NetP1_7: P1.7 R4.2 | length 4.9
  Top Layer w0.254: R4.2 P1.7
NetP1_8: P1.8 R3.2 | length 4.9
  Top Layer w0.254: R3.2 P1.8
NetP1_9: P1.9 R2.2 | length 4.9
  Top Layer w0.254: R2.2 P1.9
NetP1_10: P1.10 R1.2 | length 4.9
  Top Layer w0.254: R1.2 P1.10
NetP4_3: P4.3 R9.2 | length 4.1
  Bottom Layer w0.254: P4.3 142.764,106.41 R9.2
NetP4_4: P4.4 R10.2 | length 4.1
  Bottom Layer w0.254: P4.4 138.954,106.41 R10.2
NetP4_5: P4.5 R11.2 | length 4.1
  Bottom Layer w0.254: P4.5 135.144,106.41 R11.2
NetP4_6: P4.6 R12.2 | length 4.1
  Bottom Layer w0.254: P4.6 131.334,106.41 R12.2
NetP4_7: P4.7 R13.2 | length 4.1
  Bottom Layer w0.254: P4.7 127.524,106.41 R13.2
NetP4_8: P4.8 R15.2 | length 4.1
  Bottom Layer w0.254: P4.8 123.714,106.41 R15.2
NetP4_9: P4.9 R16.2 | length 4.1
  Bottom Layer w0.254: P4.9 119.904,106.41 R16.2
NetP4_10: P4.10 R18.2 | length 4.1
  Bottom Layer w0.254: P4.10 116.094,106.41 R18.2
NetP5_3: P5.3 R21.2 | length 6.3
  Top Layer w0.254: R21.2 115.57,56.642 P5.3@115.824,56.388
NetP5_4: P5.4 R22.2 | length 6.3
  Top Layer w0.254: R22.2 119.38,56.642 P5.4@119.634,56.388 ; R22.2@119.43,62.558 R22.2@119.43,62.562 ; R22.2@119.442,62.558 R22.2@119.442,62.574
NetP5_5: P5.5 R23.2 | length 5.5
  Top Layer w0.254: P5.5@123.24,57 R23.2@123.24,62.508
NetP5_6: P5.6 R24.2 | length 5.6
  Top Layer w0.254: P5.6@127.062,57.012 R24.2@127.062,62.574
NetP5_7: P5.7 R26.2 | length 5.6
  Top Layer w0.254: P5.7@130.86,57 R26.2@130.86,62.562
NetP5_8: P5.8 R27.2 | length 5.6
  Top Layer w0.254: P5.8@134.682,57.012 R27.2@134.682,62.574
NetP5_9: P5.9 R29.2 | length 5.6
  Top Layer w0.254: P5.9@138.48,57 R29.2@138.48,62.562
NetP5_10: P5.10 R31.2 | length 5.6
  Top Layer w0.254: P5.10@142.29,57 142.302,57.012 R31.2@142.302,62.574
NetP9_1: P9.1 VT1.4 | length 10.5
  Bottom Layer w1.016: P9.1 40.242,70.612 VT1.4
NetP10_2: P10.2 R39.1 | length 8.4
  Top Layer w0.254: P10.2 40.64,97.536 R39.1
NetP10_3: P10.3 R37.1 | length 8.7
  Top Layer w0.254: P10.3 41.402,94.488 R37.1
NetP10_4: P10.4 R36.1 | length 9
  Top Layer w0.254: P10.4 42.164,91.44 R36.1
NetP10_5: P10.5 R35.1 | length 9.3
  Top Layer w0.254: P10.5 36.904,82.042 R35.1
NetP11_3: P11.3 R42.2 | length 2.4
  Top Layer w0.254: P11.3 R42.2
NetP11_4: P11.4 R43.2 | length 2.4
  Top Layer w0.254: P11.4 R43.2
OUT_1: DD1.13 DD3.2 | length 80
  Top Layer w0.254: DD1.13 91.6,72.889 94.444,70.045 127.313,70.045 129.345,68.013 138.068,68.013 138.865,67.216 144.178,67.216 v1(144.272,67.31)
  Bottom Layer w0.254: DD3.2 144.145,83.778 143.425,83.058 142.704,83.058 140.97,81.324 140.97,74.458 143.764,71.664 143.764,69.509 144.018,69.255 144.018,67.564 v1(144.272,67.31)
OUT_2: DD1.14 DD3.3 | length 76
  Top Layer w0.254: DD1.14 92.4,72.807 94.654,70.553 127.523,70.553 129.555,68.521 138.279,68.521 139.076,67.724 142.146,67.724 v1(143.002,68.58)
  Bottom Layer w0.254: DD3.3 142.853,84.686 142.853,83.925 140.462,81.534 140.462,74.248 143.256,71.454 143.256,69.937 143.002,69.683 v1(143.002,68.58)
OUT_3: DD1.15 DD3.4 | length 73.2
  Top Layer w0.254: DD1.15 93.2,72.726 94.865,71.061 127.734,71.061 129.766,69.029 138.489,69.029 139.286,68.232 140.622,68.232 v1(141.224,68.834)
  Bottom Layer w0.254: v1(141.224,68.834) 141.434,68.834 142.748,70.148 142.748,71.243 139.954,74.037 139.954,81.744 141.605,83.395 DD3.4
OUT_4: DD1.16 DD3.5 | length 70.6
  Top Layer w0.254: DD1.16 94,72.644 95.075,71.569 127.944,71.569 129.976,69.537 139.505,69.537 v1(139.7,69.342)
  Bottom Layer w0.254: v1(139.7,69.342) 140.208,69.85 141.732,69.85 142.24,70.358 142.24,71.033 139.446,73.827 139.446,81.955 140.335,82.844 DD3.5
OUT_5: DD1.17 DD3.6 | length 64.1
  Top Layer w0.254: DD1.17 97.661,79 104.584,72.077 128.155,72.077 130.187,70.045 138.966,70.045 139.279,70.358 140.462,70.358 v1(140.97,70.866)
  Bottom Layer w0.254: DD3.6 138.938,84.581 138.938,73.406 140.97,71.374 v1(140.97,70.866)
OUT_6: DD1.18 DD3.7 | length 63
  Top Layer w0.254: DD1.18 97.579,79.8 104.794,72.585 128.365,72.585 130.397,70.553 138.756,70.553 139.069,70.866 139.446,70.866 139.954,71.374 v1(139.446,71.374)
  Bottom Layer w0.254: DD3.7 137.795,83.312 138.43,82.677 138.43,73.196 139.446,72.18 v1(139.446,71.374)
OUT_7: DD1.19 DD3.8 | length 60
  Top Layer w0.254: DD1.19 97.498,80.6 105.005,73.093 128.576,73.093 130.608,71.061 137.101,71.061 v1(137.668,71.628)
  Bottom Layer w0.254: DD3.8 136.525,83.693 137.922,82.296 137.922,71.882 v1(137.668,71.628)
OUT_8: DD1.42 DD3.9 | length 60.5
  Top Layer w0.254: DD1.42 86.8,91.508 87.6,90.708 88.616,90.708 v1(88.646,90.678)
  Bottom Layer w0.254: v1(88.646,90.678) 90.598,90.678 91.614,91.694 93.646,91.694 95.17,93.218 128.016,93.218 132.842,88.392 132.842,82.804 133.096,82.55 134.747,82.55 135.255,83.058 DD3.9
OUT_9: DD1.57 DD2.8 | length 71
  Top Layer w0.254: DD1.57 86.124,84.6 v1(88.646,87.122) ; v1(131.318,75.438) 131.747,75.867 DD2.8@135.524,75.867
  Bottom Layer w0.254: v1(88.646,87.122) 89.408,86.36 92.71,86.36 96.52,90.17 126.753,90.17 129.794,87.129 129.794,84.161 129.286,83.653 129.286,82.332 129.032,82.078 129.032,78.45 130.048,77.434 130.048,76.839 131.318,75.569 v1(131.318,75.438)
OUT_10: DD1.56 DD2.9 | length 72.8
  Top Layer w0.254: DD1.56 80.35,85.344 84.836,85.344 v1(86.614,87.122) ; v1(132.842,74.422) 133.017,74.597 DD2.9@135.524,74.597
  Bottom Layer w0.254: v1(86.614,87.122) 87.035,87.122 88.051,88.138 89.067,88.138 89.662,87.543 89.662,86.868 92.5,86.868 96.31,90.678 126.964,90.678 130.302,87.34 130.302,83.951 129.794,83.443 129.794,82.122 129.54,81.868 129.54,78.66 130.556,77.644 130.556,77.049 131.151,76.454 131.826,76.454 132.842,75.438 v1(132.842,74.422)
PDI: DD1.2 DD5.1 P7.1 | length 47.2
  Top Layer w0.254: DD5.1 72.225,67.95 74.554,67.95 v1(74.676,68.072) 75.251,68.072 76.061,68.882 76.903,68.882 77.967,67.818 81.578,67.818 82.8,69.04 DD1.2
  Bottom Layer w0.254: P7.1 53.83,58.612 64.234,69.016 66.671,69.016 66.679,69.008 67.818,69.008 67.826,69.016 73.732,69.016 v1(74.676,68.072)
PDO: DD1.3 DD5.4 P7.9 | length 61.2
  Top Layer w0.254: v1(66.04,71.12) 66.25,70.91 v1(66.25,68) 67.965,68 DD5.4 ; v1(76.482,67.866) 77.038,67.31 82.042,67.31 83.6,68.868 DD1.3
  Bottom Layer w0.254: P7.9 44.297,57.52 45.694,58.917 46.769,58.917 47.785,59.933 52.996,59.933 63.603,70.54 65.46,70.54 v1(66.04,71.12) ; v1(66.25,68) 66.75,68.5 72.978,68.5 73.66,67.818 73.66,67.564 74.168,67.056 75.672,67.056 v1(76.482,67.866)
RES: C1.2 DD1.20 P7.5 R25.2 | length 77.6
  Top Layer w0.254: DD1.20 97.416,81.4 99.716,79.1 C1.2 103.65,79.1 R25.2 v1(103.75,77.47)
  Bottom Layer w0.254: P7.5 48.75,57.883 49.784,58.917 53.417,58.917 64.024,69.524 66.881,69.524 66.889,69.516 67.607,69.516 67.615,69.524 93.472,69.524 94.306,70.358 102.616,70.358 103.75,71.492 v1(103.75,77.47)
ROTATION: DD1.31 DD2.3 | length 45.6
  Top Layer w0.254: DD1.31 96.819,90.2 97.282,89.737 97.282,88.987 98.131,88.138 101.092,88.138 v1(101.346,88.392) ; v1(128.778,85.09) 131.064,85.09 131.318,84.836 131.318,84.372 133.521,82.169 DD2.3
  Bottom Layer w0.254: v1(101.346,88.392) 101.854,88.392 102.616,89.154 126.282,89.154 127.762,87.674 127.762,86.106 v1(128.778,85.09)
RS: DD1.48 P3.4 | length 44.6
  Top Layer w0.254: P3.4 48.418,109.03 49.055,109.667 54.126,109.667 54.793,109 54.793,105.043 65.857,93.98 81.788,93.98 82,93.768 DD1.48
RXD1: DD1.27 P6.4 | length 21.6
  Top Layer w0.254: DD1.27 95.772,87.122 100.461,87.122 100.715,86.868 102.152,86.868 102.616,86.404 102.616,85.685 103.211,85.09 104.053,85.09 105.156,86.193 v1(105.156,86.614)
  Bottom Layer w0.254: v1(105.156,86.614) 104.902,86.36 105.41,85.852 114.232,85.852 P6.4
TXD1: DD1.28 P6.3 | length 21
  Top Layer w0.254: DD1.28 97.751,87.8 97.921,87.63 100.671,87.63 100.925,87.376 102.362,87.376 v1(103.632,86.106)
  Bottom Layer w0.254: v1(103.632,86.106) 104.394,85.344 113.177,85.344 114.25,84.271 P6.3
TXDE: DD1.4 DD5.2 DD5.3 | length 25.4
  Top Layer w0.254: DD5.3 DD5.2 70.705,67.31 71.213,66.802 82.252,66.802 84.4,68.95 DD1.4
VCC: C5.2 C6.2 C8.1 C9.1 C13.2 C14.2 C15.2 C16.2 C17.2 C18.2 C19.2 C20.2 C21.2 C22.2 C23.2 C24.2 DA1.3 DD1.21 DD1.52 DD2.20 DD3.20 DD4.20 DD5.8 P1.1 P1.2 P2.6 P3.1 P4.1 P4.2 P5.1 P5.2 P6.1 P7.2 P8.1 P10.6 P11.1 R14.1 R19.1 R20.1 R25.1 R30.2 R32.2 R38.2 R40.2 R41.2 VD1.2 VD2.2 | length 515.8
  Top Layer w0.254: P3.1@45.878,105.252 P3.1 ; C5.2 C20.2 65.97,64.4 66.848,65.278 69.088,65.278 70.104,64.262 71.628,64.262 71.975,63.915 DD5.8 ; C16.2 77.7,88.9 78,88.6 DD1.52 81.953,88.6 v1(82.55,88.003) ; C14.2 90.794,55.234 91.313,55.753 DD4.20 ; DD1.21 98.394,82.2 v1(99.06,81.534) 100.583,80.011 103.011,80.011 103.75,80.75 R25.1 R25.1@103.65,81.1 ; DD2.20@144.924,84.757 146.129,84.757 146.304,84.932 146.304,86.868 C22.2@145.865,87.307
  Top Layer w1.016: P10.6 39.116,78.232 43.18,82.296 43.18,84.074 43.942,84.836 C8.1@44.708,84.836 ; v1(53.34,101.854) 53.848,101.346 R38.2 ; P7.2 63.05,54.98 P8.1 62.626,56.5 60.706,58.42 60.706,63.5 61.606,64.4 C5.2 63.07,71.452 66.564,74.946 71.644,74.946 R30.2 71.49,77.624 C6.2 ; C24.2 C16.2 ; C14.2 91.302,53.34 104.14,53.34 107.442,56.642 P5.1 P5.2 ; R25.1@103.65,81.1 C15.2 ; C9.1 114.692,95.25 C19.2 124.322,95.366 125.984,97.028 v1(145.542,97.028) ; P6.1@114.184,78.184 P6.1@114.25,78.184 ; P6.1 116.742,78.25 C21.2 116.956,78.232 P11.1 R41.2 R40.2 ; C22.2 145.934,96.636 v1(145.542,97.028) ; P4.1 P4.2 145.542,105.41 v1(145.542,97.028) ; P1.1 P1.2
  Bottom Layer w0.254: P8.1 65.57,57.5 R32.2 64.444,59 63.5,59.944 63.5,61.722 64.228,62.45 VD1.2 66.47,63.5 70.866,63.5 71.916,62.45 VD2.2 ; 84.23,102.714 86.165,104.648 86.165,106.975 P2.6 ; DD3.20 v1@145.415,97.028 ; P4.1@150.368,106.172 P4.1@150.384,106.172
  Bottom Layer w1.016: C17.2 41.988,105.5 R14.1 45.648,105.5 P3.1 48.768,102.84 52.354,102.84 v1(53.34,101.854) 51.666,100.18 51.666,88.75 ; C8.1 C23.2@47.752,84.836 ; C23.2 50.43,84.72 ; DA1.3 52.434,82.716 50.43,84.72 ; R19.1 R20.1 68.944,105.3 70.866,103.378 77.778,103.378 C18.2 80,104.192 80.814,103.378 83.352,103.378 84.622,102.108 84.622,91.186 82.55,89.114 v1(82.55,88.003) 79.741,88.003 78.994,88.75 72.5,88.75 ; P5.1 P5.2 112.014,58.928 ; v1(145.542,97.028) 146.304,97.028 147.204,96.128 C13.2 147.204,72.76 155.194,64.77 P1.2 P1.1 153.416,60.96 152.146,62.23 115.316,62.23 112.014,58.928 ; P4.2 P4.1 ; 50.43,84.72 51.666,85.956 51.666,88.75 ; 51.666,88.75 72.5,88.75 ; 72.5,88.75 72.5,75.802 v1(71.628,74.93) 72.39,74.168 90.678,74.168 98.044,81.534 v1(99.06,81.534) 105.156,81.534 108.44,78.25 P6.1 114.25,74.118 112.014,71.882 112.014,58.928
VCC+12V: C10.1 C11.2 C12.2 DA1.1 VT1.3 | length 27.6
  Bottom Layer w1.016: C11.2 C12.2 52.317,76.846 DA1.1 54.101,76.963 55.88,75.184 55.88,66.04 53.341,63.501 VT1.3
VERTICAL: DD1.32 DD2.2 | length 44.6
  Top Layer w0.254: DD1.32 96.96,91 v1(98.806,89.154) ; v1(128.778,86.614) 131.064,86.614 131.826,85.852 131.826,84.582 132.969,83.439 DD2.2
  Bottom Layer w0.254: v1(98.806,89.154) 99.06,89.154 99.568,89.662 126.492,89.662 128.778,87.376 v1(128.778,86.614)
XTL1: C2.2 DD1.24 Y1.2 | length 16.6
  Top Layer w0.254: DD1.24 95.65,84.582 95.668,84.6 97.141,84.6 97.159,84.582 105.582,84.582 Y1.2 107.9,86.9 C2.2
XTL2: C7.2 DD1.23 Y1.1 | length 20.8
  Top Layer w0.254: DD1.23 97.79,83.8 98.006,84.016 104.734,84.016 107.25,81.5 Y1.1 107.9,77.1 C7.2
pads on no net: C1.0 C2.0 C3.0 C4.0 C5.0 C6.0 C7.0 C8.0 C9.0 C10.0 C11.0 C12.0 C13.0 C14.0 C15.0 C16.0 C17.0 C18.0 C19.0 C20.0 C21.0 C22.0 C23.0 C24.0 DA1.0 DD1.1 DD1.43 DD5.0 LD1.0 P2.0 P3.0 P3.7 P3.8 P3.9 P3.10 P7.0 P7.3 R1.0 R2.0 R3.0 R4.0 R5.0 R6.0 R7.0 R8.0 R9.0 R10.0 R11.0 R12.0 R13.0 R14.0 R15.0 R16.0 R17.0 R18.0 R19.0 R20.0 R21.0 R22.0 R23.0 R24.0 R25.0 R26.0 R27.0 R28.0 R29.0 R30.0 R31.0 R32.0 R33.0 R34.0 R35.0 R36.0 R37.0 R38.0 R39.0 R40.0 R41.0 R42.0 R43.0 VD1.0 VD2.0 VT1.0 Y1.0

## Polygon pours and split planes (outlines as drawn)
GND on Bottom Layer "Top Layer-No Net 1" (solid, remove dead copper, pour order 4): 30.026,113.031 30.026,50.031 165.026,50.031 165.026,113.031
GND on Top Layer "Top Layer-No Net 1" (solid, remove dead copper, pour order 3): 30.269,112.815 30.269,49.815 165.269,49.815 165.269,112.815

## Keep-outs
Keep-Out Layer:
  the board outline again, w2

## Silkscreen, mask and mechanical layers (free items; w line width, h text height)
Top Overlay:
  text "GND" at 108.966,110.236 h1
  text "O8" at 115.062,110.236 h1
  text "O7" at 118.872,110.236 h1
  text "O6" at 122.428,110.236 h1
  text "O5" at 126.238,110.236 h1
  text "O4" at 130.302,110.236 h1
  text "O3" at 133.858,110.236 h1
  text "O2" at 137.668,110.236 h1
  text "O1" at 141.986,110.236 h1
  text "VCC" at 147.32,110.236 h1
  text "GND" at 163.322,99.568 h1 r90
  text "GND" at 31.75,98.552 h1 r270
  text "AI4" at 31.75,94.488 h1 r270
  text "UControl_Module" at 57.912,93.98 h1.5
  text "O12" at 163.576,93.726 h1 r90
  text "AI3" at 31.75,90.932 h1 r270
  text "I12" at 163.576,90.17 h1 r90
  text "CHM v1.19" at 57.912,88.392 h1.5
  text "AI2" at 31.75,87.122 h1 r270
  text "O11" at 163.576,86.36 h1 r90
  text "AI1" at 31.75,83.058 h1 r270
  text "I11" at 163.576,82.804 h1 r90
  text "VCC" at 31.75,79.502 h1 r270
  text "PCB v1.9" at 58.166,79.248 h1.5
  text "O10" at 163.576,78.486 h1 r90
  text "I10" at 163.576,74.93 h1 r90
  text "O9" at 163.576,71.374 h1 r90
  text "I9" at 163.576,67.564 h1 r90
  text "~" at 123.571,62.23 h1 r180
  text "~" at 127.508,62.23 h1 r180
  text "~" at 131.191,62.23 h1 r180
  text "(~)" at 120.396,61.722 h1 r180
  text "VCC" at 163.576,61.468 h1 r90
  text "VCC" at 108.204,51.562 h1
  text "I1" at 114.808,51.562 h1
  text "I2" at 118.618,51.562 h1
  text "I3" at 122.682,51.562 h1
  text "I4" at 126.492,51.562 h1
  text "I5" at 130.048,51.562 h1
  text "I6" at 133.858,51.562 h1
  text "I7" at 137.922,51.562 h1
  text "I8" at 141.732,51.562 h1
  text "GND" at 146.558,51.562 h1

## Text inside footprints (layer, text, board x,y; h text height)
C8: Top Overlay "+" at 44.45,87.376 h0.7 r270
C9: Top Overlay "+" at 112.776,92.71 h0.7 r90
C10: Top Overlay "+" at 44.45,79.502 h0.7 r270
P2: Top Overlay "13" at 97.087,103.063 h0.7; Top Overlay "14" at 98.135,111.318 h0.7 r180; Top Overlay "1" at 82.289,103.063 h0.7; Top Overlay "2" at 82.634,111.318 h0.7 r180
P3: Top Overlay "2" at 46.132,111.318 h0.7 r180; Top Overlay "1" at 45.787,103.063 h0.7; Top Overlay "16" at 64.173,111.318 h0.7 r180; Top Overlay "15" at 63.125,103.063 h0.7
P7: Top Overlay "9" at 44.203,60.187 h0.7 r180; Top Overlay "10" at 43.155,51.932 h0.7; Top Overlay "1" at 53.921,60.187 h0.7 r180; Top Overlay "2" at 53.576,51.932 h0.7